# EAGLE board turbo_jumper (EAGLE 9.6.2)
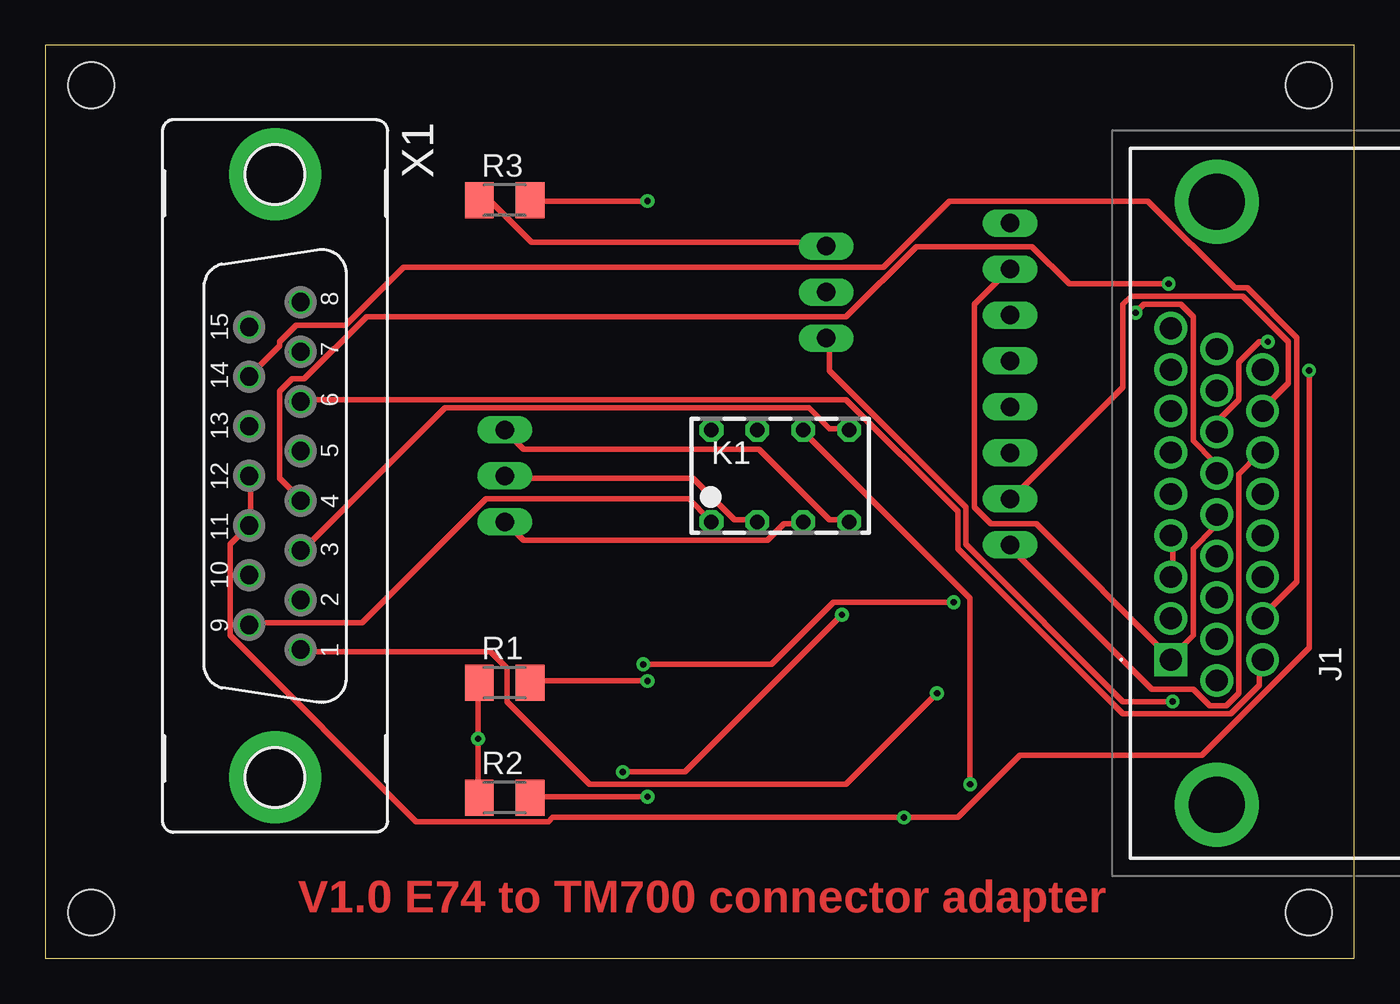
[diagram p0: board, top side]
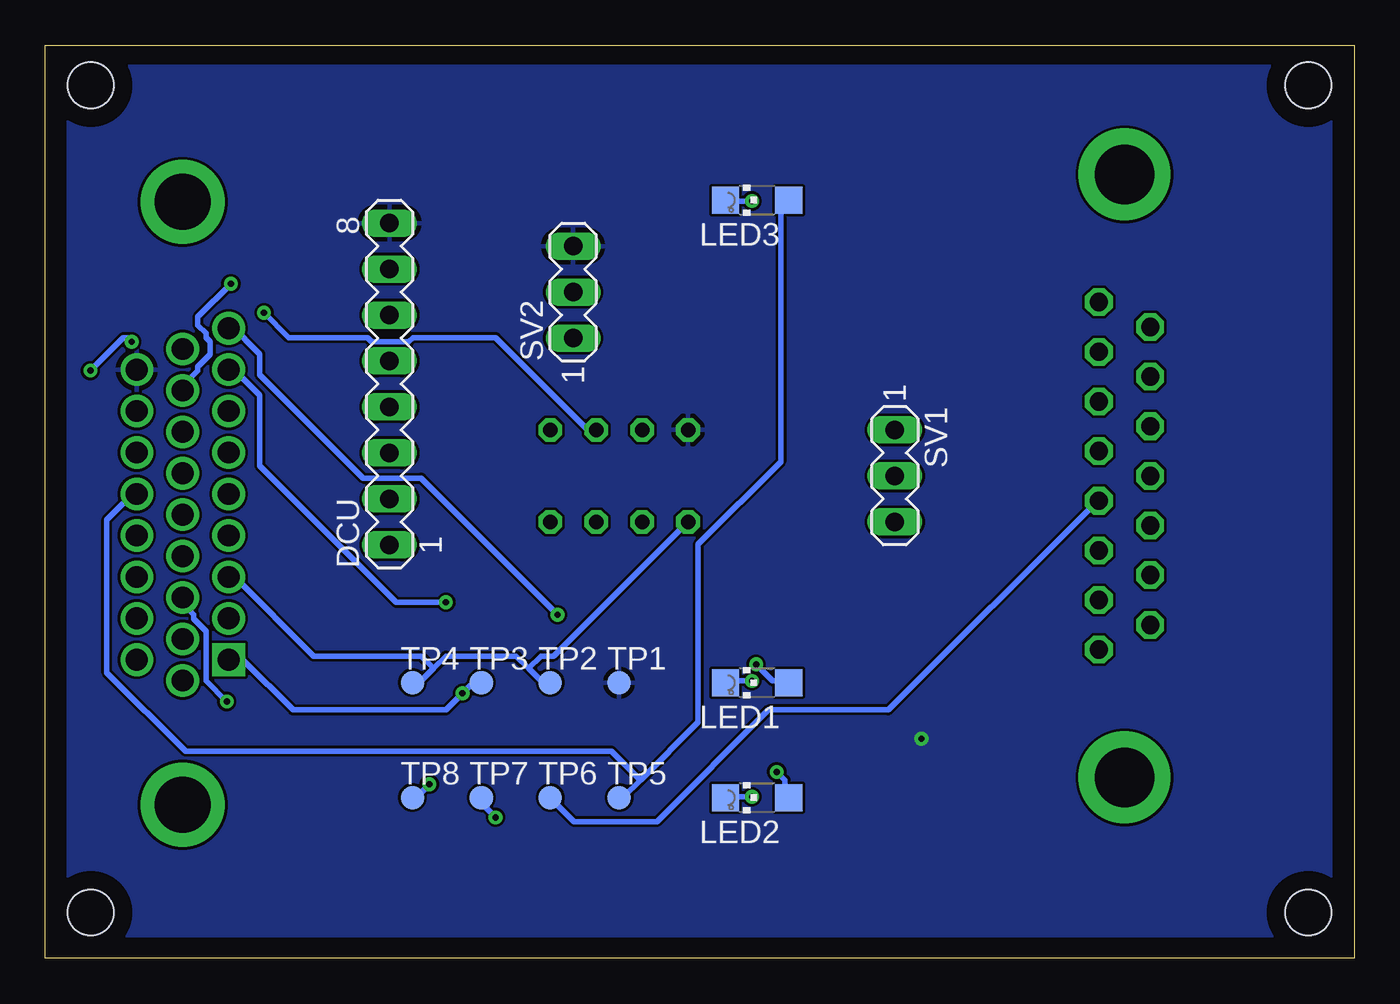
[diagram p1: board, bottom side, seen from below]

Size 72.37 x 50.47 mm. Coordinates in mm from the lower left corner, seen from the top.
Outline: 0,0 72.37,0 72.37,50.47 0,50.47 0,0
Copper layers (1*16): Top 0.035mm / dielectric 1.5mm / Bottom 0.035mm
Design rules "default": minimum track width 6mil, minimum drill 0.35mm, track to track 6mil, track to pad 6mil, pad to pad 6mil, via to via 6mil, smd to smd 6mil, copper to edge 40mil, drill to drill 6mil, minimum pad ring 10mil, minimum via ring 8mil, stop-mask expansion 4mil, vias tented up to drill 0mil, thermal gap 10mil
Net classes: 0 default: width 0.305 mm
Holes 2.54 mm at 2.54,48.26 69.85,48.26 69.85,2.54 2.54,2.54

## Footprints (pad centres in the part's own frame; a part is rotated, then mirrored left to right if it is on the bottom)
MA08-1 = drill 1.016 long: 1 -8.89,0; 2 -6.35,0; 3 -3.81,0; 4 -1.27,0; 5 1.27,0; 6 3.81,0; 7 6.35,0; 8 8.89,0
10090926P264XLF = drill 1.2 pad 1.8 square: 1 0,0 | drill 1.2 pad 1.8: 2 2.29,0; 3 4.58,0; 4 6.87,0; 5 9.16,0; 6 11.45,0; 7 13.74,0; 8 16.03,0; 9 18.32,0; 10 -1.145,-2.54; 11 1.145,-2.54; 12 3.435,-2.54; 13 5.725,-2.54; 14 8.015,-2.54; 15 10.305,-2.54; 16 12.595,-2.54; 17 14.885,-2.54; 18 17.175,-2.54; 19 0,-5.08; 20 2.29,-5.08; 21 4.58,-5.08; 22 6.87,-5.08; 23 9.16,-5.08; 24 11.45,-5.08; 25 13.74,-5.08; 26 16.03,-5.08 | drill 3.1 pad 4.65: MH1 -8.015,-2.54; MH2 25.305,-2.54
G6K-2P = drill 0.8 octagon: 1 -2.54,-2.54; 2 0,-2.54; 3 2.54,-2.54; 4 5.08,-2.54; 5 5.08,2.54; 6 2.54,2.54; 7 0,2.54; 8 -2.54,2.54
CHIPLED_1206 = smd 1.5 x 1.5: A 0,-1.75; C 0,1.75
M1206 = smd 1.6 x 2: 1 -1.4,0; 2 1.4,0
MA03-1 = drill 1.016 long: 1 -2.54,0; 2 0,0; 3 2.54,0
TP13R = smd 1.3 x 1.3: TP 0,0
F15VP = drill 1.016 octagon: 1 9.601,1.422; 2 6.858,1.422; 3 4.115,1.422; 4 1.372,1.422; 5 -1.372,1.422; 6 -4.115,1.422; 7 -6.858,1.422; 8 -9.601,1.422; 9 8.23,-1.422; 10 5.486,-1.422; 11 2.743,-1.422; 12 0,-1.422; 13 -2.743,-1.422; 14 -5.486,-1.422; 15 -8.23,-1.422 | drill 3.302 pad 5.08: G1 -16.662,0; G2 16.662,0

## Placement (x,y rotation side)
DCU  DCU  [MA08-1]  53.34,31.75 90 bottom
J1  10090926-P264XLF  [10090926P264XLF]  62.23,16.51 90 top
K1  G6K-2P  [G6K-2P]  39.37,26.67 0 top
LED1  speed  [CHIPLED_1206]  33.02,15.24 90 bottom
LED2  error  [CHIPLED_1206]  33.02,8.89 90 bottom
LED3  in remote  [CHIPLED_1206]  33.02,41.91 90 bottom
R1  10k  [M1206]  25.4,15.24 0 top
R2  10k  [M1206]  25.4,8.89 0 top
R3  10k  [M1206]  25.4,41.91 0 top
SV1  AUX-SW  [MA03-1]  25.4,26.67 270 bottom
SV2  ANALOG OUT  [MA03-1]  43.18,36.83 90 bottom
TP1  TPSQTP13R  [TP13R]  40.64,15.24 0 bottom
TP2  TPSQTP13R  [TP13R]  44.45,15.24 0 bottom
TP3  TPSQTP13R  [TP13R]  48.26,15.24 0 bottom
TP4  TPSQTP13R  [TP13R]  52.07,15.24 0 bottom
TP5  TPSQTP13R  [TP13R]  40.64,8.89 0 bottom
TP6  TPSQTP13R  [TP13R]  44.45,8.89 0 bottom
TP7  TPSQTP13R  [TP13R]  48.26,8.89 0 bottom
TP8  TPSQTP13R  [TP13R]  52.07,8.89 0 bottom
X1  E74  [F15VP]  12.7,26.67 270 top

## Library data of the parts
DCU SV1 SV2 = con-lstb; OC_FARNELL: unknown; OC_NEWARK: unknown
J1 = 10090926-P264XLF; DESCRIPTION: 26 Position D-Sub, High Density Plug, Male Pins Connector; HEIGHT: 12.8mm; MANUFACTURER_NAME: Amphenol; MANUFACTURER_PART_NUMBER: 10090926-P264XLF; MOUSER_PART_NUMBER: 649-10090926-P264XLF; MOUSER_PRICE-STOCK: https://www.mouser.co.uk/ProductDetail/Amphenol-FCI/10090926-P264XLF?qs=EnLMdcWnKABFbd55HgNl%252Bg%3D%3D
K1 = relay; MF: OMRON COMPONENTS USA; MPN: G6K-2P DC3; OC_FARNELL: 3937276; OC_NEWARK: 89C6482
LED1-LED3 = led
R1-R3 = rcl; SPICEPREFIX: R
TP1-TP8 = testpad
X1 = con-subd; OC_FARNELL: unknown; OC_NEWARK: unknown

## Nets
24+_REMOTE_PRI: DCU.7 J1.1 J1.14 TP3.TP X1.1
ACCEL+: K1.5 X1.3
ALARM+: J1.19 X1.6
ALARM-: J1.20 X1.14
AO1: J1.12 SV2.1
D+: DCU.1 J1.24
D-: DCU.2 J1.25
DECEL+: X1.5
DECEL-: X1.13
ERROR: J1.9 LED2.A
GND: DCU.8 J1.26 K1.8 R1.1 R2.1 R3.1 SV2.3 TP1.TP
N$2: LED3.C R3.2
N$3: LED1.C R1.2
N$4: LED2.C R2.2
NORM+: J1.17 TP6.TP X1.4
NORM-: J1.16 TP7.TP X1.11 X1.12
NOT_NORM: J1.15 K1.6 TP8.TP
R-COM: K1.3 SV1.3
R-NC: K1.2 SV1.2
R-NO: K1.4 SV1.1
REMOTE_ACTIVE: J1.23 LED3.A TP5.TP
SPEED: J1.8 LED1.A
START-: J1.3 J1.4 K1.1 TP2.TP TP4.TP X1.9

## Tracks (layer width: path | path; a pad name or v marks a point on that pad's centre or on a via)
24+_REMOTE_PRI  (via drill 0.35)
  Top 0.305: v49.3,14.66 44.27,9.63 30.1,9.63 25.53,14.2 25.53,16.03 24.61,16.94 14.33,16.94 X1.1 | DCU.7 53.19,37.97 51.36,36.14 51.36,24.94 52.27,24.03 54.79,24.03 62.1,16.71 J1.1 62.33,16.71 63.48,17.86 63.48,22.66 64.62,23.8 64.62,24.49 J1.14
  Bottom 0.305: TP3.TP 48.39,15.11 48.84,15.11 v49.3,14.66 50.22,13.74 58.67,13.74 61.42,16.48 62.1,16.48 J1.1
ACCEL+
  Top 0.305: K1.5 44.27,29.29 43.36,29.29 42.22,30.43 22.1,30.43 14.33,22.66 X1.3
ALARM+
  Top 0.305: X1.6 14.33,30.89 44.27,30.89 50.44,24.71 50.44,22.66 59.59,13.51 65.53,13.51 67.13,15.11 67.13,16.48 J1.19
ALARM-
  Top 0.305: X1.14 11.35,32.26 12.95,33.86 12.95,34.09 13.87,35 16.61,35 19.81,38.2 46.33,38.2 49.99,41.86 60.96,41.86 65.76,37.06 66.45,37.06 69.19,34.31 69.19,20.83 67.36,19 J1.20
AO1  (via drill 0.35)
  Top 0.305: v62.33,14.2 59.59,14.2 50.9,22.88 50.9,24.94 43.36,32.49 43.36,34.09 SV2.1
  Bottom 0.305: v62.33,14.2 63.48,15.34 63.48,18.09 64.16,18.77 64.16,19 64.62,19.46 64.62,19.91 J1.12
D+
  Top 0.305: DCU.1 53.42,22.66 61.19,14.88 63.48,14.88 64.39,13.97 65.3,13.97 65.99,14.66 65.99,26.77 67.13,27.91 J1.24
D-
  Top 0.305: DCU.2 53.42,25.4 59.59,31.57 59.59,36.14 60.05,36.6 66.22,36.6 68.73,34.09 68.73,31.8 67.36,30.43 J1.25
ERROR  (via drill 0.35)
  Top 0.305: v31.93,10.31 35.36,10.31 v44.04,19
  Bottom 0.305: v31.93,10.31 31.47,9.85 31.47,8.94 LED2.A | v44.04,19 51.59,26.54 54.79,26.54 60.5,32.26 60.5,33.4 62.1,35 J1.9
GND  (via drill 0.35)
  Top 0.305: R2.1 23.93,8.94 v23.93,12.14 23.93,15.11 R1.1 | R3.1 24.16,41.86 24.61,41.86 26.9,39.57 43.13,39.57 SV2.3
  pour Bottom: 1.27,49.53 71.12,49.53 71.12,1.27 1.27,1.27
N$2  (via drill 0.35)
  Top 0.305: v33.3,41.86 26.9,41.86 R3.2
  Bottom 0.305: v33.3,41.86 34.67,41.86 LED3.C
N$3  (via drill 0.35)
  Top 0.305: v33.3,15.34 26.9,15.34 R1.2
  Bottom 0.305: v33.3,15.34 34.67,15.34 LED1.C
N$4  (via drill 0.35)
  Top 0.305: v33.3,8.94 26.9,8.94 R2.2
  Bottom 0.305: v33.3,8.94 34.67,8.94 LED2.C
NORM+  (via drill 0.35)
  Top 0.305: v62.1,37.29 56.62,37.29 54.56,39.34 48.16,39.34 44.27,35.46 17.76,35.46 14.33,32.03 13.64,32.03 12.95,31.34 12.95,26.54 14.1,25.4 X1.4
  Bottom 0.305: TP6.TP 43.13,7.57 38.56,7.57 32.39,13.74 25.76,13.74 14.33,25.17 X1.4 | v62.1,37.29 63.93,35.46 63.93,35 63.48,34.54 63.48,34.31 63.25,34.09 63.25,33.4 63.93,32.72 63.93,32.49 64.62,31.8 64.62,31.57 J1.17
NORM-  (via drill 0.35)
  Top 0.305: X1.12 11.35,26.54 11.35,24.03 X1.11 11.12,23.8 10.21,22.88 10.21,17.86 20.5,7.57 27.81,7.57 28.04,7.8 v47.47,7.8 50.44,7.8 53.87,11.23 63.93,11.23 69.88,17.17 v69.88,32.49 | v67.59,34.09 67.13,34.09 65.99,32.94 65.99,30.89 64.85,29.74 64.85,29.29 J1.16
  Bottom 0.305: v47.47,7.8 48.16,8.48 48.16,8.71 TP7.TP | v67.59,34.09 67.82,34.31 68.05,34.31 v69.88,32.49
NOT_NORM  (via drill 0.35)
  Top 0.305: v51.13,9.63 51.13,19.91 41.99,29.06 K1.6 | v60.27,35.69 60.73,36.14 62.79,36.14 63.48,35.46 63.48,28.6 64.62,27.46 64.62,27 J1.15
  Bottom 0.305: v51.13,9.63 51.82,8.94 52.05,8.94 TP8.TP | v60.27,35.69 58.9,34.31 54.56,34.31 54.33,34.09 52.27,34.09 52.05,34.31 47.47,34.31 42.44,29.29 41.99,29.29 K1.6
R-COM
  Top 0.305: K1.3 41.76,24.03 40.84,24.03 39.93,23.11 26.44,23.11 25.53,24.03 SV1.3
R-NC
  Top 0.305: K1.2 39.24,24.26 38.1,24.26 35.81,26.54 25.53,26.54 SV1.2
R-NO
  Top 0.305: K1.4 44.27,24.26 43.36,24.26 39.47,28.14 26.44,28.14 25.53,29.06 SV1.1
REMOTE_ACTIVE
  Bottom 0.305: 39.47,9.85 36.27,13.06 36.27,22.88 31.7,27.46 31.7,41.63 31.47,41.86 LED3.A | 39.47,9.85 40.39,8.94 40.62,8.94 TP5.TP | 39.47,9.85 41.07,11.45 64.62,11.45 68.96,15.8 68.96,24.26 68.05,25.17 67.82,25.17 67.36,25.63 J1.23
SPEED  (via drill 0.35)
  Top 0.305: v33.07,16.26 40.16,16.26 43.59,19.69 v50.22,19.69
  Bottom 0.305: v33.07,16.26 32.16,15.34 31.47,15.34 LED1.A | v50.22,19.69 52.96,19.69 60.5,27.23 60.5,31.12 62.1,32.72 J1.8
START-
  Top 0.305: J1.3 62.33,21.28 62.33,23.34 J1.4 | X1.9 11.35,18.54 17.53,18.54 24.38,25.4 35.59,25.4 36.73,24.26 K1.1
  Bottom 0.305: 45.64,16.03 46.33,16.71 50.22,16.71 50.9,16.03 | 45.64,16.03 44.96,15.34 44.5,15.34 TP2.TP | 50.9,16.03 51.59,15.34 52.05,15.34 TP4.TP | 45.64,16.03 44.96,16.71 44.27,16.71 36.96,24.03 K1.1 | 50.9,16.03 51.59,16.71 57.53,16.71 61.87,21.06 62.1,21.06 J1.3

## Text on the board
Top: V1.0 E74 to TM700 connector adapter